# Altium PCB PPU_PCB.PcbDoc
Units mil, origin at the board's own origin, x right, y up, seen from the top; angles counter-clockwise.
Board outline 6000 x 4000 mil, 2 copper layers (Top Layer, Bottom Layer); 37 components, 17 nets, 230 pads, 0 vias.
Unrouted connection lines stored in the file: 90.
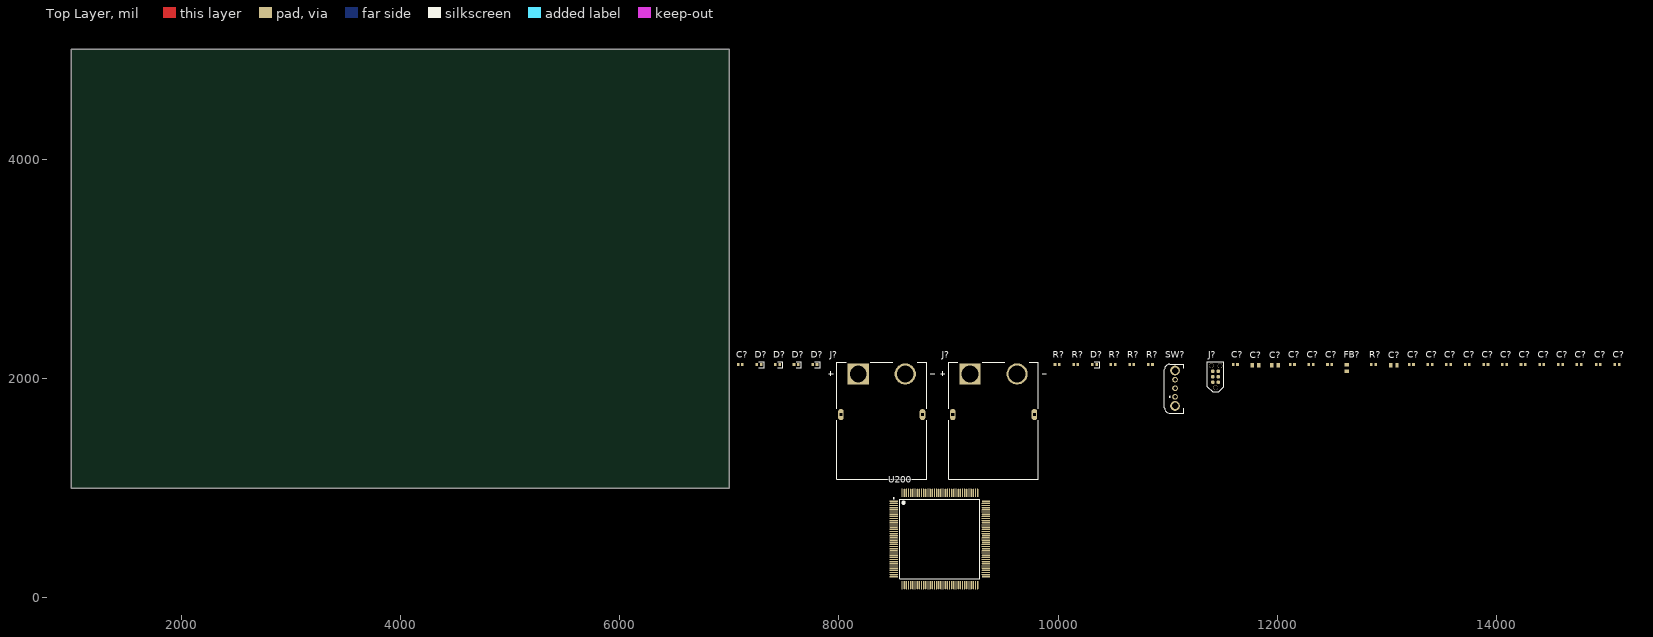
[diagram p0: Top Layer view]
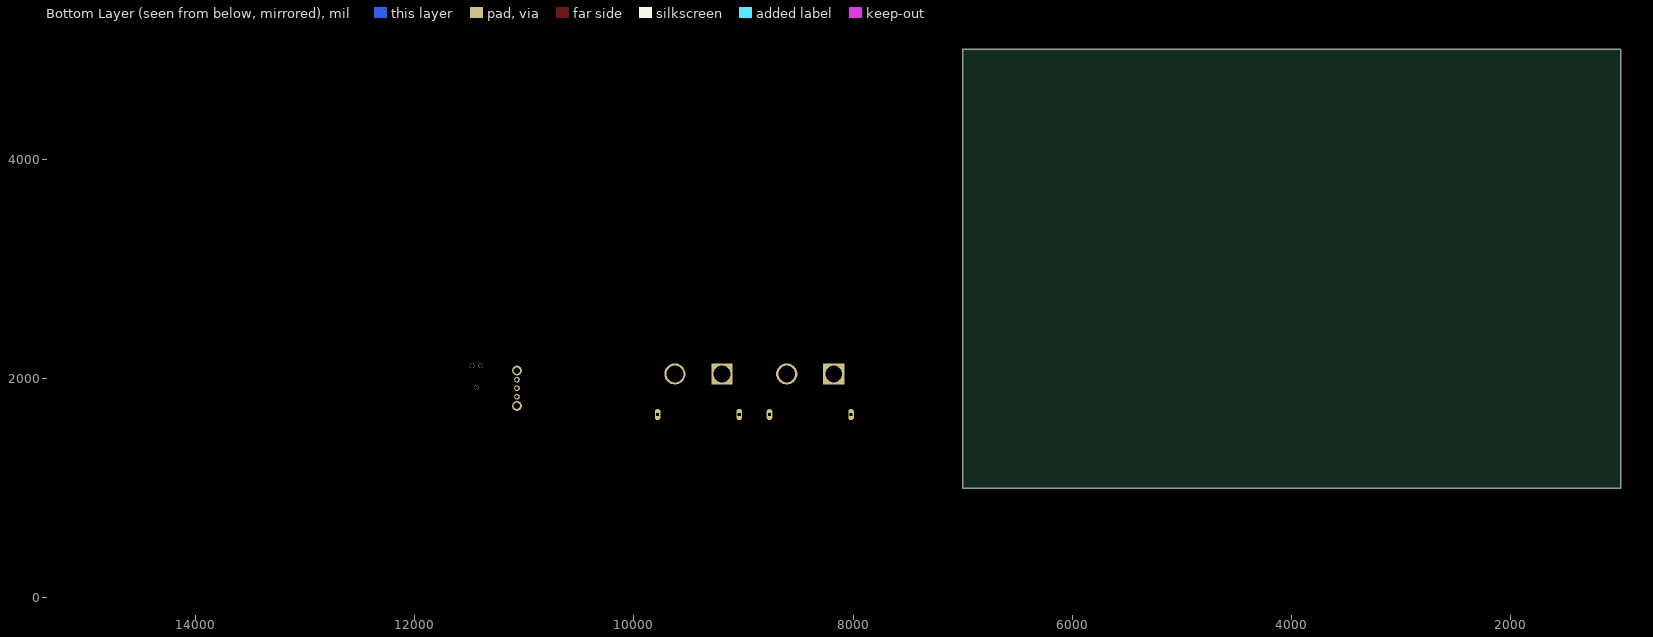
[diagram p1: Bottom Layer view, seen from below]

## Layer stack, top to bottom
Top Solder: solder mask 0.4, Solder Resist, Dk 3.5
Top Layer: signal copper 1.4
Dielectric 1: dielectric 12.6, FR-4, Dk 4.8
Bottom Layer: signal copper 1.4
Bottom Solder: solder mask 0.4, Solder Resist, Dk 3.5

## Board outline
1000,1000 7000,1000 7000,5000 1000,5000

## Design rules (kind name [scope] priority, off if disabled: settings)
Clearance [All] p1: gap=10 ignorepadtopadclearanceinfootprint=FALSE except(0: Arc-Hole Track-Hole SMDPad-Hole THPad-Hole Via-Hole Fill-Hole Poly-Hole Region-Hole Text-Hole)
PolygonConnect [All] p1: connectstyle=Relief reliefconductorwidth=10 reliefentries=4 polygonreliefangle="90 Angle" airgapwidth=10
RoomDefinition PPU_Schematic [InComponentClass('PPU_Schematic')] p1: confinementstyle=ConfineIn formatcopy=TRUE lockcomponents=FALSE outline 7045,1060 16185,1060 16185,2265 7045,2265
RoutingVias [All] p1: holewidth=28 width=50 viastyle="Through Hole" minholewidth=28 minwidth=50 maxholewidth=28 maxwidth=50
SolderMaskExpansion [All] p1: expansion=4 istentingtop=FALSE
Width [All] p1: maxlimit=10 minlimit=10 preferedwidth=10
30 further rules are at their usual default settings.

## Classes and differential pairs
component class PPU_Schematic: C? D? FB? J? R? SW? U200

## Components (designator, comment, footprint, x,y, rotation, side; value= is the part's Value field where it differs from the comment)
C? "100n" CAP_0402 12475,2125 r0 top
C? "100n" CAP_0402 15095,2125 r0 top
C? "100n" CAP_0402 14580,2125 r0 top
C? "100n" CAP_0402 14070,2125 r0 top
C? "100n" CAP_0402 13390,2125 r0 top
C? "100n" CAP_0402 14410,2125 r0 top
C? "100n" CAP_0402 14240,2125 r0 top
C? "100n" CAP_0402 13560,2125 r0 top
C? "2u2" CAP_0603 13060,2120 r0 top
C? "100n" CAP_0402 13900,2125 r0 top
C? "100n" CAP_0402 13220,2125 r0 top
C? "100n" CAP_0402 7100,2125 r0 top
C? "2u2" CAP_0603 11975,2120 r0 top
C? "100n" CAP_0402 12135,2125 r0 top
C? "100n" CAP_0402 13730,2125 r0 top
C? "100n" CAP_0402 11615,2125 r0 top
C? "100n" CAP_0402 14925,2125 r0 top
C? "100n" CAP_0402 14750,2125 r0 top
C? "2u2" CAP_0603 11800,2120 r0 top
C? "100n" CAP_0402 12305,2125 r0 top
D? "RCLAMP0521P-N" D_0402 7610,2125 r0 top
D? "RCLAMP0521P-N" D_0402 7440,2125 r0 top
D? "RCLAMP0521P-N" D_0402 7780,2125 r0 top
D? "RCLAMP0521P-N" D_0402 10330,2125 r0 top
D? "RCLAMP0521P-N" D_0402 7270,2125 r0 top
FB? "120R" FB_0603 12630,2095 r90 top
J? "TC-2030NL" TC2030-NL-FP 11435,2015 r90 top
J? "XT90PW-M" AMASS_XT90PW-M 9410,1670 r0 top
J? "XT90PW-M" AMASS_XT90PW-M 8390,1670 r0 top
R? "49R9" RES_0402 9990,2125 r0 top
R? "49R9" RES_0402 10160,2125 r0 top
R? "49R9" RES_0402 10840,2125 r0 top
R? "49R9" RES_0402 10670,2125 r0 top
R? "0R" RES_0402 12875,2125 r0 top
R? "10k" RES_0402 10500,2125 r0 top
SW? "OS102011MA1QN1" OS102011MA1QN1 11065,1910 r90 top
U200 "STM32H723ZGT6" FP-LQFP144-1A-IPC_A 8920,535 r0 top

## Footprints (in the part's own frame and the unit in brackets; to place one, negate y for a bottom-side part, rotate by r counter-clockwise, add the part's x,y. Pads: shape width x height; smd on the part's side, far side on the other; paste and mask are expansions set on the pad)
AMASS_XT90PW-M [mm]
  round 4.916 hole 3.9: N(5.45,9.4)
  rect 4.916x4.916 hole 3.9: P(-5.45,9.4)
  oval 1.3x2.6 hole 0.6 square: S1(-9.45,0) S2(9.45,0)
  silkscreen extent -12.25,-15 12.25,12.1, body extent -10.6,-15 10.6,12.1, height 10.3
CAP_0402 [mm]
  rect 0.6x0.7 smd: 1(-0.5,0) 2(0.5,0)
  body extent -0.5,-0.26 0.5,0.26, height 0.37
CAP_0603 [mm]
  rect 0.8x1 smd: 1(-0.75,0) 2(0.75,0)
  body extent -0.8,-0.4 0.8,0.4, height 0.51
D_0402 [mm]
  rect 0.6x0.7 smd: A(-0.5,0) K(0.5,0)
  silkscreen extent 0,-0.7 1.2,0.7, body extent -0.5,-0.25 0.5,0.25, height 0.51
FB_0603 [mm]
  rect 0.8x1 smd: 1(-0.75,0) 2(0.75,0)
  body extent -0.8,-0.4 0.8,0.4, height 0.81
FP-LQFP144-1A-IPC_A [mm]
  rect 1.955x0.312 smd paste+0 mask+0: 1(-10.675,8.75)
  rrect100% 1.955x0.312 smd paste+0 mask+0: 2(-10.675,8.25) 3(-10.675,7.75) 4(-10.675,7.25) 5(-10.675,6.75) 6(-10.675,6.25) 7(-10.675,5.75) 8(-10.675,5.25) 9(-10.675,4.75) 10(-10.675,4.25) 11(-10.675,3.75) 12(-10.675,3.25) 13(-10.675,2.75) 14(-10.675,2.25) 15(-10.675,1.75) 16(-10.675,1.25) 17(-10.675,0.75) 18(-10.675,0.25) 19(-10.675,-0.25) 20(-10.675,-0.75) 21(-10.675,-1.25) 22(-10.675,-1.75) 23(-10.675,-2.25) 24(-10.675,-2.75) 25(-10.675,-3.25) 26(-10.675,-3.75) 27(-10.675,-4.25) 28(-10.675,-4.75) 29(-10.675,-5.25) 30(-10.675,-5.75) 31(-10.675,-6.25) 32(-10.675,-6.75) 33(-10.675,-7.25) 34(-10.675,-7.75) 35(-10.675,-8.25) 36(-10.675,-8.75) 73(10.675,-8.75) 74(10.675,-8.25) 75(10.675,-7.75) 76(10.675,-7.25) 77(10.675,-6.75) 78(10.675,-6.25) 79(10.675,-5.75) 80(10.675,-5.25) 81(10.675,-4.75) 82(10.675,-4.25) 83(10.675,-3.75) 84(10.675,-3.25) 85(10.675,-2.75) 86(10.675,-2.25) 87(10.675,-1.75) 88(10.675,-1.25) 89(10.675,-0.75) 90(10.675,-0.25) 91(10.675,0.25) 92(10.675,0.75) 93(10.675,1.25) 94(10.675,1.75) 95(10.675,2.25) 96(10.675,2.75) 97(10.675,3.25) 98(10.675,3.75) 99(10.675,4.25) 100(10.675,4.75) 101(10.675,5.25) 102(10.675,5.75) 103(10.675,6.25) 104(10.675,6.75) 105(10.675,7.25) 106(10.675,7.75) 107(10.675,8.25) 108(10.675,8.75)
  rrect100% 0.312x1.955 smd paste+0 mask+0: 37(-8.75,-10.675) 38(-8.25,-10.675) 39(-7.75,-10.675) 40(-7.25,-10.675) 41(-6.75,-10.675) 42(-6.25,-10.675) 43(-5.75,-10.675) 44(-5.25,-10.675) 45(-4.75,-10.675) 46(-4.25,-10.675) 47(-3.75,-10.675) 48(-3.25,-10.675) 49(-2.75,-10.675) 50(-2.25,-10.675) 51(-1.75,-10.675) 52(-1.25,-10.675) 53(-0.75,-10.675) 54(-0.25,-10.675) 55(0.25,-10.675) 56(0.75,-10.675) 57(1.25,-10.675) 58(1.75,-10.675) 59(2.25,-10.675) 60(2.75,-10.675) 61(3.25,-10.675) 62(3.75,-10.675) 63(4.25,-10.675) 64(4.75,-10.675) 65(5.25,-10.675) 66(5.75,-10.675) 67(6.25,-10.675) 68(6.75,-10.675) 69(7.25,-10.675) 70(7.75,-10.675) 71(8.25,-10.675) 72(8.75,-10.675) 109(8.75,10.675) 110(8.25,10.675) 111(7.75,10.675) 112(7.25,10.675) 113(6.75,10.675) 114(6.25,10.675) 115(5.75,10.675) 116(5.25,10.675) 117(4.75,10.675) 118(4.25,10.675) 119(3.75,10.675) 120(3.25,10.675) 121(2.75,10.675) 122(2.25,10.675) 123(1.75,10.675) 124(1.25,10.675) 125(0.75,10.675) 126(0.25,10.675) 127(-0.25,10.675) 128(-0.75,10.675) 129(-1.25,10.675) 130(-1.75,10.675) 131(-2.25,10.675) 132(-2.75,10.675) 133(-3.25,10.675) 134(-3.75,10.675) 135(-4.25,10.675) 136(-4.75,10.675) 137(-5.25,10.675) 138(-5.75,10.675) 139(-6.25,10.675) 140(-6.75,10.675) 141(-7.25,10.675) 142(-7.75,10.675) 143(-8.25,10.675) 144(-8.75,10.675)
  silkscreen extent -10.8,-9.25 9.25,9.58, body extent -12.15,-12.15 12.15,12.15, height 0.25
OS102011MA1QN1 [mm]
  round 1.3 hole 0.8: 1(-2,0) 2(0,0) 3(2,0)
  round 2.25 hole 1.5: MH(-4.1,0) MH(4.1,0)
  silkscreen extent -5.75,-2 5.57,2.45, body extent -4.3,-6.22 4.3,2.18, height 4.59
RES_0402 [mm]
  rect 0.6x0.7 smd: 1(-0.5,0) 2(0.5,0)
  body extent -0.5,-0.25 0.5,0.25, height 0.3
TC2030-NL-FP [mil]
  round 33.98 smd: 1(-50,-25) 2(-50,25) 3(0,-25) 4(0,25) 5(50,-25) 6(50,25)
  round 42.01 hole 42.01 unplated: MH(-100,0) MH(100,-40) MH(100,40)
  silkscreen extent -138,-75 138,75

## Part data
C? C? C? C? C? C? C? C? C? C? C? C? C? C? C? C? C?: library part CAP_0402_16V, "Capacitor SMD 0402 16V"
C? C? C?: library part CAP_0603_16V, "Capacitor SMD 0603 16V"
D? D? D? D? D?: library part D_TVS_0402, "Diode TVS / ESD 0402"
FB?: library part FB_0603, "Ferrite Bead SMD 0603"
J?: library part TC2030-NL, "Tag-Connect No-Solder SWD Debug Connector (No Legs) DO NOT PLACE", Manufacturer=Tag-Connect, Manfucaturer Number=TC2030-NL-FP
J? J?: "Socket; DC supply; XT90; male; PIN: 2; on PCBs; THT; Colour: yellow", Package=Package, Availability="Not in stock", Check_prices=https://www.snapeda.com/parts/XT90PW-M/AMASS/view-part/?ref=eda, MF=AMASS, MP=XT90PW-M, Price=None, SnapEDA_Link=https://www.snapeda.com/parts/XT90PW-M/AMASS/view-part/?ref=snap
R? R? R? R? R? R?: library part RES_0402, "Resistor SMD 0402"
SW?: "Slide Switch SPDT Horizontal THT", Manufacturer=C&K, Manufacturer Part Number=OS102011MA1QN1
U200: library part CMP-12105-000148-1, "IC MCU 32BIT 1MB FLASH 144LQFP"

## Nets (pads, with @x,y where several pads share a name; then routed paths per layer and width w, separated by ;. In a path a pad name is that pad's centre, name@x,y a point inside that pad or via, vN(x,y) a via of type N, cw(c..) or ccw(c..) an arc to the next point about the centre after c; other vN are vias at no path point)
+3.3V: C?.2@11634.69,2125 C?.2@12154.69,2125 C?.2@13089.53,2120 C?.2@13239.69,2125 C?.2@13409.69,2125 C?.2@13579.69,2125 C?.2@13749.69,2125 C?.2@13919.69,2125 C?.2@14089.69,2125 C?.2@14259.69,2125 C?.2@14429.69,2125 C?.2@14599.69,2125 C?.2@14769.69,2125 C?.2@14944.69,2125 C?.2@15114.69,2125 D?.K@10349.69,2125 FB?.1 J?.1 J?.P R?.2@12894.69,2125 SW?.1 U200.6 U200.17 U200.30 U200.39 U200.52 U200.62 U200.72 U200.84 U200.95 U200.108 U200.121 U200.131 U200.144
GND: C?.1 D?.A J?.5 J?.N SW?.3 U200.16 U200.31 U200.38 U200.51 U200.61 U200.83 U200.94 U200.107 U200.120 U200.130
MCU_BOOT0: R?.2@10519.69,2125 U200.138
MCU_PDR_ON: R?.1@12855.32,2125 U200.143
MCU_RESET: U200.25
MCU_VCAP_1: C?.2@11829.53,2120 U200.71
MCU_VCAP_2: C?.2@12004.53,2120 U200.106
MCU_VDDA: C?.2@12324.69,2125 C?.2@12494.69,2125 FB?.2 U200.32 U200.33
NetR?_1: R?.1@10480.32,2125 SW?.2
NRST: C?.2@7119.69,2125 R?.1@9970.32,2125
SWCLK: R?.1@10650.32,2125
SWDIO: R?.1@10820.32,2125
SWO: R?.1@10140.32,2125
TC_NRST: D?.K@7799.69,2125 J?.3 R?.2@10009.69,2125
TC_SWCLK: D?.K@7459.69,2125 J?.4 R?.2@10689.69,2125
TC_SWDIO: D?.K@7289.69,2125 J?.2 R?.2@10859.69,2125
TC_SWO: D?.K@7629.69,2125 J?.6 R?.2@10179.69,2125
pads on no net: J?.MH J?.S1 J?.S2 SW?.MH U200.1 U200.2 U200.3 U200.4 U200.5 U200.7 U200.8 U200.9 U200.10 U200.11 U200.12 U200.13 U200.14 U200.15 U200.18 U200.19 U200.20 U200.21 U200.22 U200.23 U200.24 U200.26 U200.27 U200.28 U200.29 U200.34 U200.35 U200.36 U200.37 U200.40 U200.41 U200.42 U200.43 U200.44 U200.45 U200.46 U200.47 U200.48 U200.49 U200.50 U200.53 U200.54 U200.55 U200.56 U200.57 U200.58 U200.59 U200.60 U200.63 U200.64 U200.65 U200.66 U200.67 U200.68 U200.69 U200.70 U200.73 U200.74 U200.75 U200.76 U200.77 U200.78 U200.79 U200.80 U200.81 U200.82 U200.85 U200.86 U200.87 U200.88 U200.89 U200.90 U200.91 U200.92 U200.93 U200.96 U200.97 U200.98 U200.99 U200.100 U200.101 U200.102 U200.103 U200.104 U200.105 U200.109 U200.110 U200.111 U200.112 U200.113 U200.114 U200.115 U200.116 U200.117 U200.118 U200.119 U200.122 U200.123 U200.124 U200.125 U200.126 U200.127 U200.128 U200.129 U200.132 U200.133 U200.134 U200.135 U200.136 U200.137 U200.139 U200.140 U200.141 U200.142